# Altium PCB PCB1.PcbDoc
Units mil, origin at the board's own origin, x right, y up, seen from the top; angles counter-clockwise.
Board outline 1000 x 3000 mil, 4 copper layers (Top Layer, Internal Plane 1, Internal Plane 2, Bottom Layer); 17 components, 16 nets, 50 pads, 5 vias.
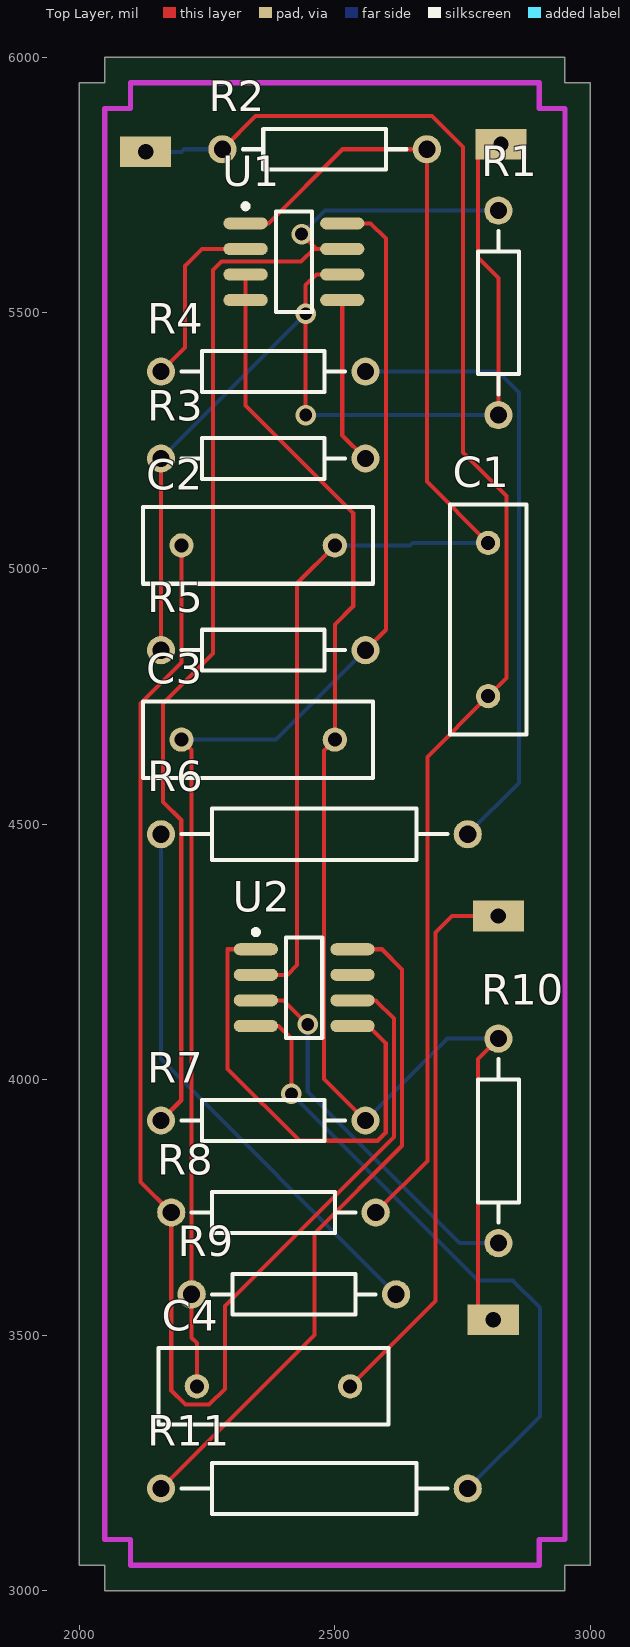
[diagram p0: Top Layer view]
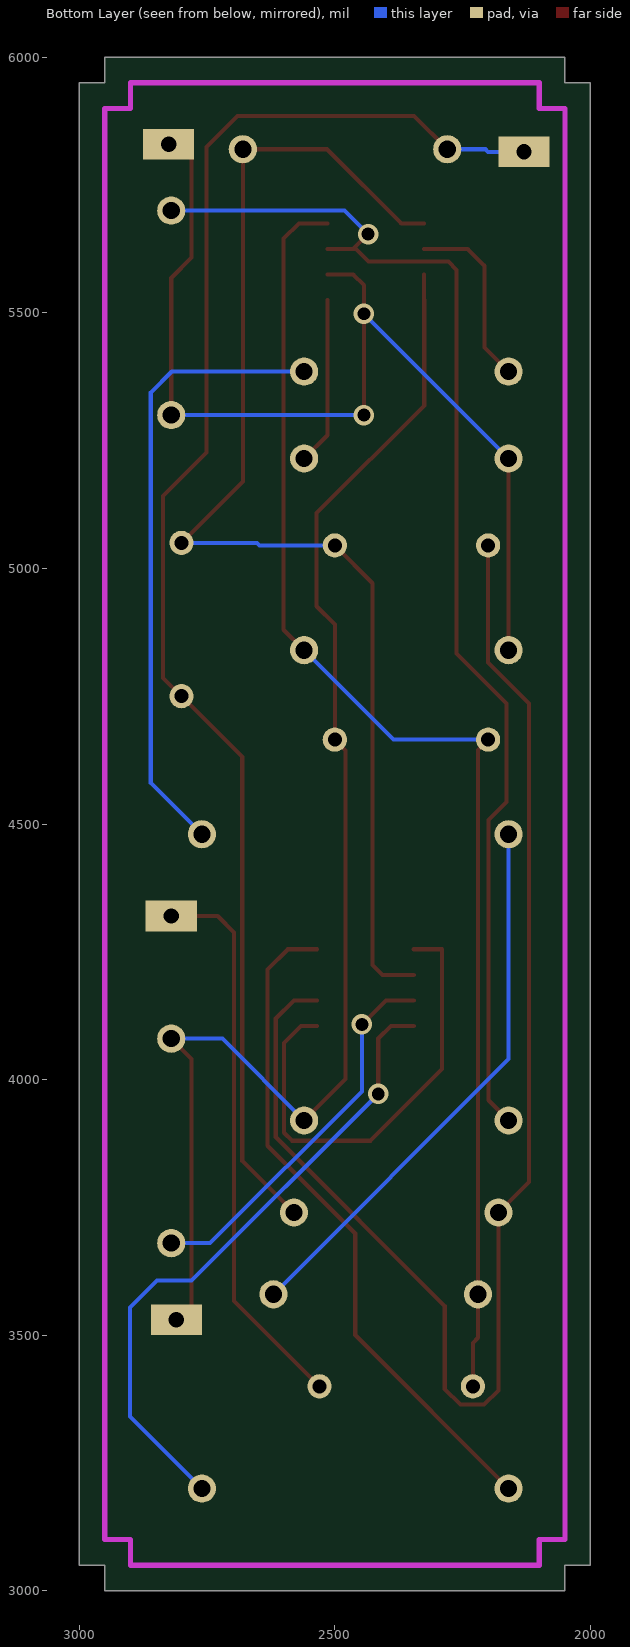
[diagram p1: Bottom Layer view, seen from below]
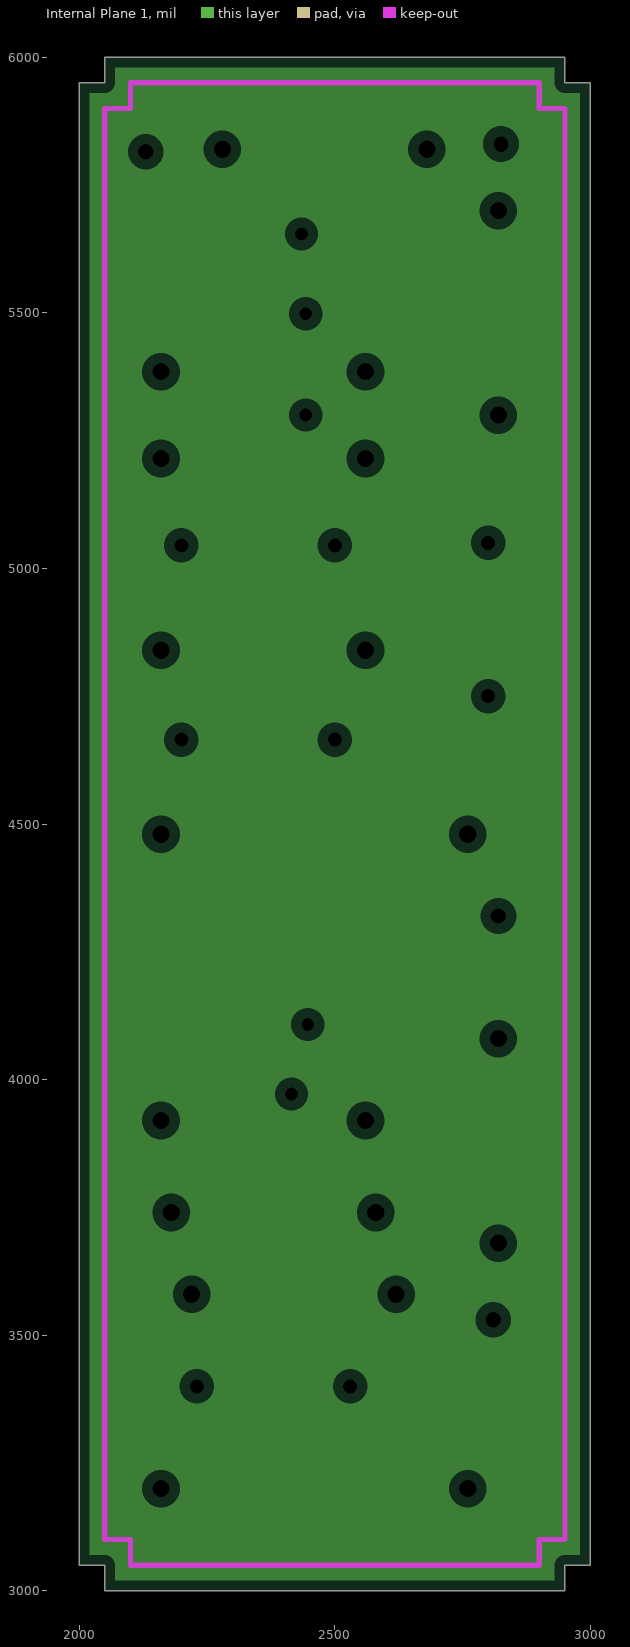
[diagram p2: Internal Plane 1, clearances drawn from the general rule]
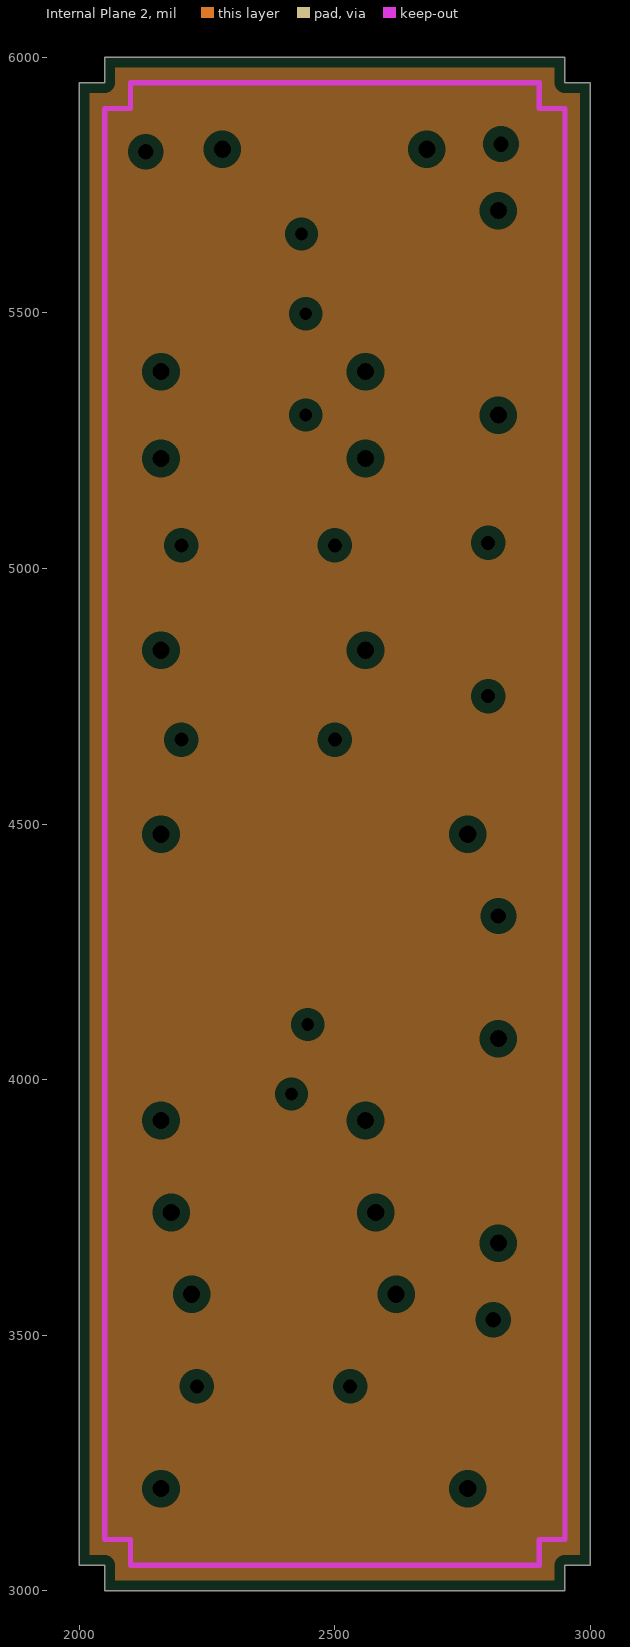
[diagram p3: Internal Plane 2, clearances drawn from the general rule]

## Layer stack, top to bottom
Top Layer: signal copper 1.4
Dielectric: dielectric 12.6, FR-4, Dk 4.8
Internal Plane 1: plane copper 1.4
Dielectric: dielectric 12.6, FR-4, Dk 4.8
Internal Plane 2: plane copper 1.4
Dielectric: dielectric 12.6, FR-4, Dk 4.8
Bottom Layer: signal copper 1.4

## Board outline
2000,3050 2050,3050 2050,3000 2950,3000 2950,3050 3000,3050 3000,5950 2950,5950 2950,6000 2050,6000 2050,5950 2000,5950

## Design rules (kind name [scope] priority, off if disabled: settings)
Clearance [All] p1: gap=8
ComponentClearance [All] p1: gap=10 collisioncheckmode=3 verticalgap=10
PlaneClearance [All] p1: clearance=20
PlaneConnect [All] p1: planeconnectstyle=Relief reliefexpansion=20 reliefentries=4 reliefconductorwidth=10 reliefairgap=10
PolygonConnect [All] p1: connectstyle=Relief reliefconductorwidth=10 reliefentries=4 polygonreliefangle="90 Angle"
RoutingVias [All] p1: holewidth=25 width=40 viastyle="Through Hole" minholewidth=28 minwidth=50 maxholewidth=28 maxwidth=50
SolderMaskExpansion [All] p1: expansion=4
TestPointUsage [All] p1: valid=0 allowmultiple=FALSE
Testpoint [All] p1: side=15 testpointundercomponent=TRUE minsize=40 maxsize=100 preferedsize=60 minholesize=0 maxholesize=40 preferedholesize=32 testpointgrid=1 style=1023 order=0-112345678
Width Width_2 [vcc] p1: maxlimit=20 minlimit=20 preferedwidth=20
Width Width_1 [GND] p2: maxlimit=20 minlimit=20 preferedwidth=20
Width [All] p3: maxlimit=8 minlimit=8 preferedwidth=8
16 further rules are at their usual default settings.

## Components (designator, comment, footprint, x,y, rotation, side; value= is the part's Value field where it differs from the comment)
C1 "Cap" RAD-0.3 2800,4900 r270 top
C2 "Cap" RAD-0.3 2350,5045 r180 top
C3 "Cap" RAD-0.3 2350,4665 r180 top
C4 "Cap" RAD-0.3 2380,3400 r180 top
R1 "Res2" AXIAL-0.4 2820,5500 r270 top
R2 "Res2" AXIAL-0.4 2480,5820 r0 top
R3 "Res2" AXIAL-0.4 2360,5215 r180 top
R4 "Res2" AXIAL-0.4 2360,5385 r180 top
R5 "Res2" AXIAL-0.4 2360,4840 r180 top
R6 "Res Adj2" AXIAL-0.6 2460,4480 r0 top
R7 "Res2" AXIAL-0.4 2360,3920 r180 top
R8 "Res2" AXIAL-0.4 2380,3740 r180 top
R9 "Res2" AXIAL-0.4 2420,3580 r180 top
R10 "Res2" AXIAL-0.4 2820,3880 r90 top
R11 "Res Adj2" AXIAL-0.6 2460,3200 r180 top
U1 "MC34151D" 751-06_N 2420,5600 r0 top
U2 "MAX4131ESA" NSO8_N 2440,4180 r0 top

## Footprints (in the part's own frame and the unit in brackets; to place one, negate y for a bottom-side part, rotate by r counter-clockwise, add the part's x,y. Pads: shape width x height; smd on the part's side, far side on the other; paste and mask are expansions set on the pad)
751-06_N [mm] "SOIC, 8-Leads, Body 4.9x3.9mm, Pitch 1.27mm, IPC Medium Density"
  oval 2.2x0.6 smd: 1(-2.4,1.905) 2(-2.4,0.635) 3(-2.4,-0.635) 4(-2.4,-1.905) 5(2.4,-1.905) 6(2.4,-0.635) 7(2.4,0.635) 8(2.4,1.905)
  silkscreen extent -2.52,-2.5 0.9,2.88, body extent -1.95,-2.45 1.95,2.45, height 1.75
AXIAL-0.4 [mm] "Resistor; 2 Leads"
  round 1.4 hole 0.85: 1(-5.08,0) 2(5.08,0)
  silkscreen extent -4.06,-1.02 4.06,1.02
AXIAL-0.6 [mm] "Variable Resistor; 2 Leads"
  round 1.4 hole 0.85: 1(-7.62,0) 2(7.62,0)
  silkscreen extent -6.6,-1.27 6.6,1.27
NSO8_N [mm] "SOIC, 8-Leads, Body 4.9x3.9mm, Pitch 1.27mm, IPC Medium Density"
  oval 2.2x0.6 smd: 1(-2.4,1.905) 2(-2.4,0.635) 3(-2.4,-0.635) 4(-2.4,-1.905) 5(2.4,-1.905) 6(2.4,-0.635) 7(2.4,0.635) 8(2.4,1.905)
  silkscreen extent -2.52,-2.5 0.9,2.88, body extent -1.95,-2.45 1.95,2.45, height 1.75
RAD-0.3 [mm] "Capacitor; 2 Leads"
  round 1.2 hole 0.7: 1(-3.81,0) 2(3.81,0)
  silkscreen extent -5.71,-1.91 5.71,1.91

## Part data
C1 C2 C3 C4: "Capacitor"
R1 R2 R3 R4 R5 R7 R8 R9 R10: "Resistor"
R6 R11: "Variable Resistor"
U1: "High Speed Dual MOSFET Driver"
U2: "Wide-Bandwidth, Low-Power, Single-Supply Rail-to-Rail I/O Op Amp"

## Free pads (board coordinates)
  rect 100x60 hole 30: 1(2820,4320) 2(2130,5815) 3(2825,5830) 4(2810,3530)

## Via types
v1: diameter 40, hole 25, Top Layer to Bottom Layer, 5 vias

## Nets (pads, with @x,y where several pads share a name; then routed paths per layer and width w, separated by ;. In a path a pad name is that pad's centre, name@x,y a point inside that pad or via, vN(x,y) a via of type N, cw(c..) or ccw(c..) an arc to the next point about the centre after c; other vN are vias at no path point)
F1: C4.1 pad.1 | length 1093.4
  Top Layer w8: C4.1 2697,3567 2697,4288 2729,4320 pad.1
GND: C3.1 pad.4 R7.1 R10.2 U1.3 U1.4 | length 2722.9
  Top Layer w8: U1.3 U1.4 2325,5525 2325,5319 2536,5108 2536,4926 2500,4890 C3.1 2479,4644 2479,4001 R7.1 ; pad.4 2780,3530 2780,4040 R10.2
  Bottom Layer w8: R7.1 2720,4080 R10.2
NetC1_1: C1.1 C2.1 R2.2 U1.1 U2.2 | length 2476.3
  Top Layer w8: U1.1 2370,5675 2515,5820 R2.2 2680,5170 C1.1 ; U2.2 2407,4205 2426,4224 2426,4971 C2.1
  Bottom Layer w8: C2.1 2647,5045 2652,5050 C1.1
NetC2_2: C2.2 R8.2 U2.6 | length 2797.6
  Top Layer w8: C2.2 2200,4816 2120,4736 2120,3800 R8.2 2180,3392 2208,3364 2254,3364 2285,3395 2285,3557.44 2615.56,3888 2615.56,4119.44 2580,4155 U2.6
NetC3_2: C3.2 C4.2 R5.1 R9.2 U1.8 | length 2629.4
  Top Layer w8: C3.2 2220,4645 R9.2 2220,3495 2230,3485 C4.2 ; U1.8 2570,5675 2600,5645 2600,4880 R5.1
  Bottom Layer w8: C3.2 2385,4665 R5.1
NetR1_1: R1.1 R7.2 U1.7 | length 2450.2
  Top Layer w8: R7.2 2199.56,3959.56 2199.56,4507.44 2164,4543 2164,4735.58 2262,4833.58 2262,5584 2278,5600 2434,5600 2459,5625 2464,5625 ; v1(2435,5654) 2464,5625 ; U1.7 2464,5625
  Bottom Layer w8: v1(2435,5654) 2481,5700 R1.1
NetR3_1: R3.1 U1.5 | length 328.9
  Top Layer w8: U1.5 2514.49,5260.51 R3.1
NetR4_1: R4.1 R6.2 | length 1222.4
  Bottom Layer w8: R4.1 2819,5385 2860,5344 2860,4580 R6.2
NetR4_2: R4.2 U1.2 | length 358.6
  Top Layer w8: R4.2 2207,5432 2207,5592 2240,5625 U1.2
NetR6_1: R6.1 R9.1 | length 1090.5
  Bottom Layer w8: R6.1 2160,4040 R9.1
NetR10_1: R10.1 U2.3 | length 748
  Top Layer w8: U2.3 2400,4155 v1(2447,4108)
  Bottom Layer w8: v1(2447,4108) 2447,3977 2744,3680 R10.1
NetR11_1: R11.1 U2.4 | length 1259.4
  Top Layer w8: U2.4 2390,4105 2415,4080 v1(2415,3972)
  Bottom Layer w8: v1(2415,3972) 2780,3607 2848,3607 2901,3554 2901,3341 R11.1
NetR11_2: R11.2 U2.8 | length 1324.2
  Top Layer w8: R11.2 2460,3500 2460,3698.99 2631.56,3870.55 2631.56,4215.44 2592,4255 U2.8
NetU2_1: U2.1 U2.5 | length 918.2
  Top Layer w8: U2.1 2290,4255 2290,4021 2430.56,3880.44 2584,3880.44 2599.56,3896 2599.56,4071.44 2566,4105 U2.5
UO: C1.2 pad.2 R2.1 R8.1 | length 2900.5
  Top Layer w8: R2.1 2345,5885 2690,5885 2751,5824 2751,5227 2836,5142 2836,4786 C1.2 2681,4631 2681,3841 R8.1
  Bottom Layer w8: pad.2 2200,5815 2205,5820 R2.1
VCC: pad.3 R1.2 R3.2 R5.2 U1.6 | length 2078
  Top Layer w8: R5.2 R3.2 ; v1(2443,5300) v1(2443,5498) 2443,5554 2464,5575 U1.6 ; R1.2 2820,5568 2780,5608 2780,5830 pad.3
  Bottom Layer w8: R3.2 v1(2443,5498) ; v1(2443,5300) R1.2
pads on no net: U2.7

## Polygon pours and split planes (outlines as drawn)
no net on Internal Plane 1 (split plane): 2950,5950 3000,5950 3000,3050 2950,3050 2950,3000 2050,3000 2050,3050 2000,3050 2000,5950 2050,5950 2050,6000 2950,6000
no net on Internal Plane 2 (split plane): 2950,5950 3000,5950 3000,3050 2950,3050 2950,3000 2050,3000 2050,3050 2000,3050 2000,5950 2050,5950 2050,6000 2950,6000

## Keep-outs
Keep-Out Layer:
  lines w10: 2050,3100 2100,3100 2100,3050 2900,3050 2900,3100 2950,3100 2950,5900 2900,5900 2900,5950 2100,5950 2100,5900 2050,5900 2050,3100

## Dimensions
2050,3100 to 2100,3050 on Mechanical 1
2100,3050 to 2050,3100 on Mechanical 1